# Altium PCB PCB1.pcbdoc
Units mil, origin at the board's own origin, x right, y up, seen from the top; angles counter-clockwise.
Board outline 1968.5 x 1778.5 mil, 2 copper layers (Top Layer, Bottom Layer), stack 62.205 mil thick; 29 components, 37 nets, 177 pads, 40 vias.
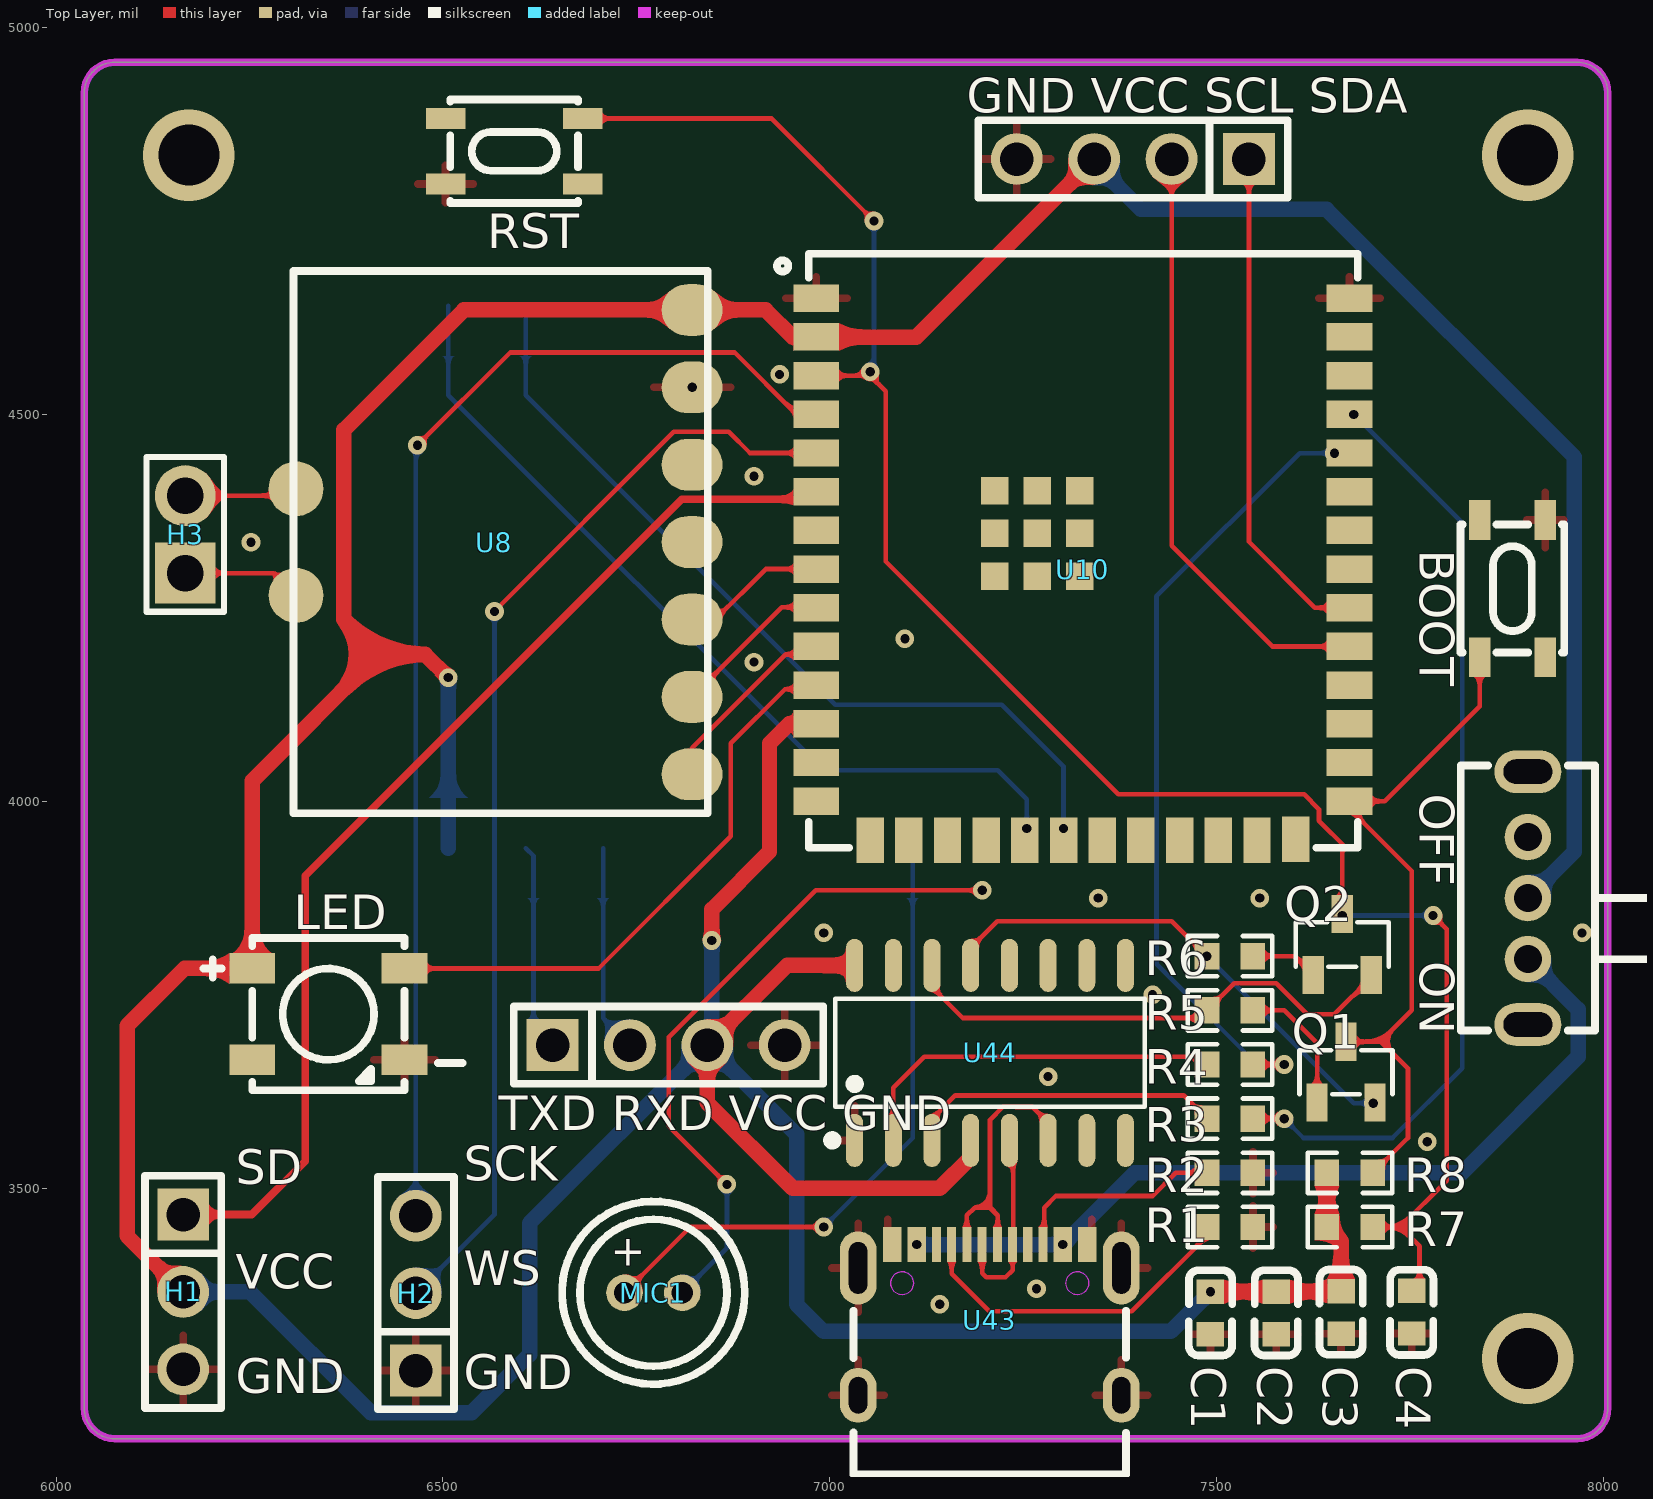
[diagram p0: Top Layer view]
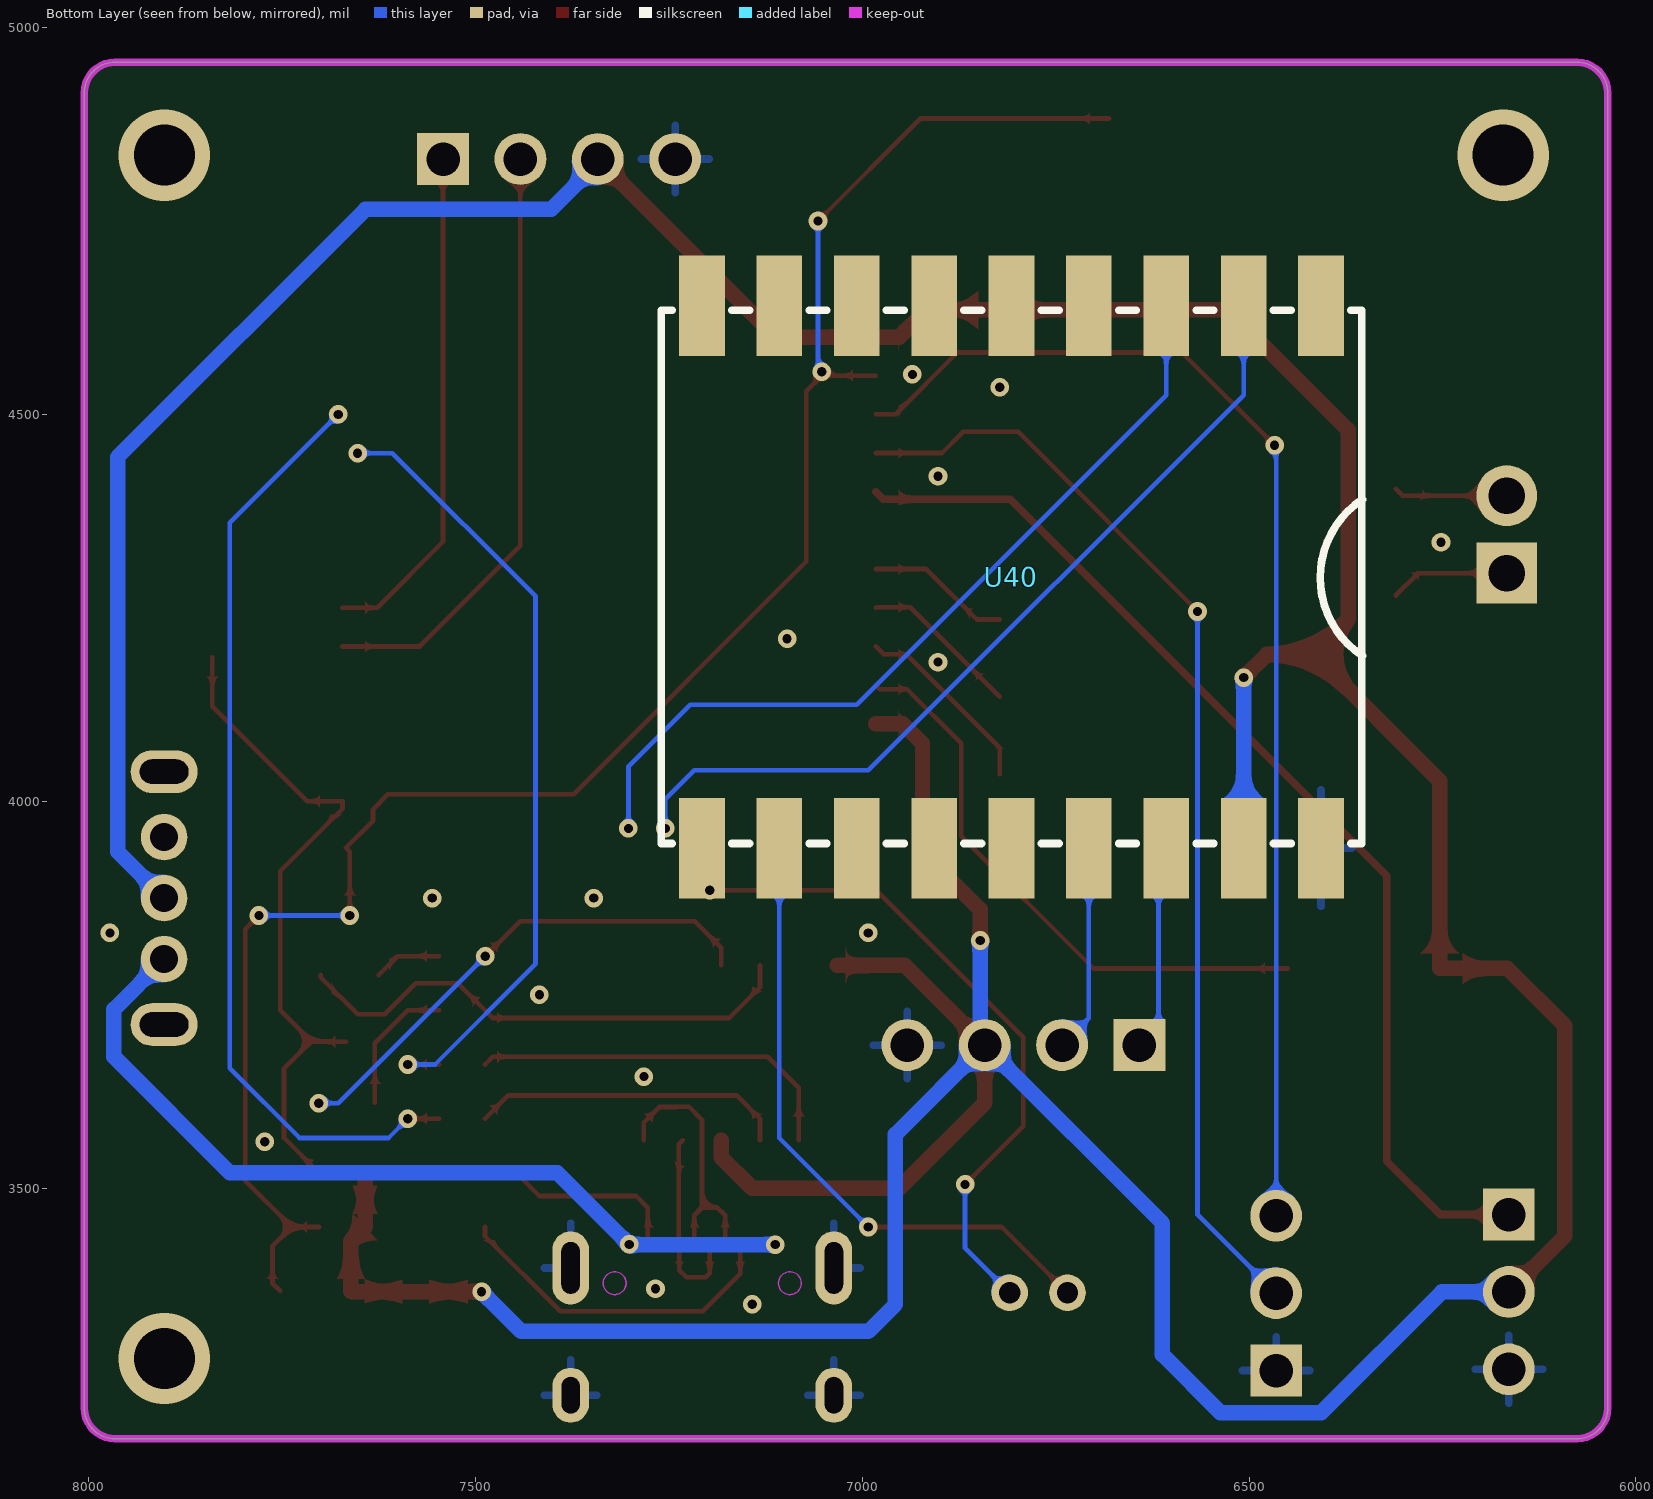
[diagram p1: Bottom Layer view, seen from below]

## Layer stack, top to bottom
Top Solder Mask Layer: solder mask 0.394, Dk 3.3
Top Layer: signal copper 1.378
Dielectric1: surface 59.449, FR4, Dk 4.5
Bottom Layer: signal copper 1.378
Bottom Solder Mask Layer: solder mask 0.394, Dk 3.3

## Board outline
6075.96,4955 7965.73,4955 cw(c7965.73,4915.63) 8005.1,4915.63 8005.1,3215.87 cw(c7965.73,3215.87) 7965.73,3176.5 6075.96,3176.5 cw(c6075.96,3215.87) 6036.59,3215.87 6036.59,4915.63 cw(c6075.96,4915.63)

## Design rules (kind name [scope] priority, off if disabled: settings)
BoardOutlineClearance copperThickness1oz [All] p0: genericclearance=10 ignorepadtopadclearanceinfootprint=FALSE except(0: Arc-SplitContinuation Track-SplitContinuation SMDPad-SplitContinuation THPad-SplitContinuation Via-SplitContinuation Fill-SplitContinuation Poly-SplitContinuation Region-SplitContinuation Text-SplitContinuation)
BoardOutlineClearance copperThickness2oz [All] p0: genericclearance=10 ignorepadtopadclearanceinfootprint=FALSE except(0: Arc-SplitContinuation Track-SplitContinuation SMDPad-SplitContinuation THPad-SplitContinuation Via-SplitContinuation Fill-SplitContinuation Poly-SplitContinuation Region-SplitContinuation Text-SplitContinuation)
BoardOutlineClearance Plane_innerPlane [All] p0: genericclearance=10 ignorepadtopadclearanceinfootprint=FALSE except(0: Arc-SplitContinuation Track-SplitContinuation SMDPad-SplitContinuation THPad-SplitContinuation Via-SplitContinuation Fill-SplitContinuation Poly-SplitContinuation Region-SplitContinuation Text-SplitContinuation)
BoardOutlineClearance Copper_copperRegion [All] p0: genericclearance=10 ignorepadtopadclearanceinfootprint=FALSE except(0: Arc-SplitContinuation Track-SplitContinuation SMDPad-SplitContinuation THPad-SplitContinuation Via-SplitContinuation Fill-SplitContinuation Poly-SplitContinuation Region-SplitContinuation Text-SplitContinuation)
BoardOutlineClearance otherClearance [All] p0: genericclearance=10 ignorepadtopadclearanceinfootprint=FALSE except(0: Arc-SplitContinuation Track-SplitContinuation SMDPad-SplitContinuation THPad-SplitContinuation Via-SplitContinuation Fill-SplitContinuation Poly-SplitContinuation Region-SplitContinuation Text-SplitContinuation)
Clearance copperThickness1oz [All] p1: gap=7 ignorepadtopadclearanceinfootprint=FALSE
Clearance copperThickness2oz [All] p1: gap=7 ignorepadtopadclearanceinfootprint=FALSE
Clearance Plane_innerPlane [All] p1: gap=7 ignorepadtopadclearanceinfootprint=FALSE
Clearance Copper_copperRegion [All] p1: gap=7 ignorepadtopadclearanceinfootprint=FALSE
Clearance otherClearance [All] p1: gap=7 ignorepadtopadclearanceinfootprint=FALSE
DiffPairsRouting differentialPair [All] p1: maxuncoupledlength=10 minlimit=6 maxlimit=Infinity mostfreqgap=6 toplayer_minwidth=5 toplayer_prefwidth=10 toplayer_maxwidth=100 bottomlayer_minwidth=5 bottomlayer_prefwidth=10 bottomlayer_maxwidth=100
PasteMaskExpansion pasteMaskExpansion [All] p1: expansion=0
PlaneConnect innerPlane [All] p1: planeconnectstyle=Relief reliefexpansion=20 reliefentries=4 reliefconductorwidth=10 reliefairgap=10
PolygonConnect copperRegion [All] p1: connectstyle=Relief reliefentries=4 reliefconductorwidth=10 polygonreliefangle="90 Angle" airgapwidth=10
RoutingVias viaSize [All] p1: viastyle="Through Hole" holewidth=12.0078 minholewidth=11.811 maxholewidth=248.0314 width=12.0078 minwidth=11.811 maxwidth=248.0314
SolderMaskExpansion solderMaskExpansion [IsVia] p1: useseparateexpansions=TRUE expansion=-1000 expansionbottom=-1000
SolderMaskExpansion solderMaskExpansion [All] p2: useseparateexpansions=TRUE expansion=2 expansionbottom=2
Width copperThickness1oz [All] p1: maxlimit=100 minlimit=5 preferedwidth=10
Width copperThickness2oz [All] p1: maxlimit=100 minlimit=8 preferedwidth=10

## Components (designator, comment, footprint, x,y, rotation, side; value= is the part's Value field where it differs from the comment)
BOOT "TS-KG89S-AT25F" SW-SMD_4P-L4.2-W3.3-P2.15-LS5.1 7881.99,4275 r90 top
C1 "1uF" C0603 7576.8,3338.8 r270 top
C2 "1uF" C0603 7660.58,3339.58 r270 top
C3 "100nF" C0603 7491.8,3338.8 r270 top
C4 "1uF" C0603 7751.99,3340 r90 top
"GND VCC SCL SDA" "PZ254V-11-04P" HDR-TH_4P-P2.54-V-M 7391.59,4830 r180 top
H1 "PZ254V-11-03P" HDR-TH_3P-P2.54-V-M 6164.29,3366.1 r270 top
H2 "PZ254V-11-03P" HDR-TH_3P-P2.54-V-M 6464.99,3364.5 r90 top
H3 "PZ254V-11-02P" HDR-TH_2P-P2.54-V-M 6166.99,4345 r90 top
LED "XL-5050RGBC-WS2812B" LED-SMD_4P-L5.0-W5.0-BL_XL-5050RGBC 6351.99,3725 r270 top
MIC1 "GMI6050P-36db" MIC-TH_BD6.0-P1.90-D0.4-L-FD_GMI6050P-2CXXDB 6771.99,3365 r0 top
"OFF     ON" "SK12D07VG4" SW-TH_SK12D07VG4 7901.99,3875 r90 top locked
Q1 "SS8050" SOT-23-3_L2.9-W1.3-P1.90-LS2.4-BR 7666.99,3650 r270 top
Q2 "SS8050" SOT-23-3_L2.9-W1.3-P1.90-LS2.4-BR 7661.99,3815 r270 top
R1 "5.1kΩ" R0603 7516.99,3450 r180 top
R2 "5.1kΩ" R0603 7516.99,3520 r0 top
R3 "0Ω" R0603 7516.99,3590 r0 top
R4 "0Ω" R0603 7516.99,3660 r0 top
R5 "10kΩ" R0603 7516.99,3730 r180 top
R6 "10kΩ" R0603 7516.99,3800 r180 top
R7 "10kΩ" R0603 7671.99,3450 r180 top
R8 "10kΩ" R0603 7671.99,3520 r180 top
RST "TS-KG89S-AT25F" SW-SMD_4P-L4.2-W3.3-P2.15-LS5.1 6591.99,4840 r180 top
"TXD RXD VCC GND" "PZ254V-11-04P" HDR-TH_4P-P2.54-V-M 6791.59,3685 r0 top locked
U8 "" MAX98357moudle 6461.99,4335 r90 top
U10 "ESP32-S3-WROOM-1U-N16R8" WIRELM-SMD_ESP32-S3-WROOM-1U 7326.99,4300 r0 top
U40 "ASRPRO-core" COMM-SMD_ASRPRO-CORE-V1.1 6806.99,4290 r270 bottom
U43 "24018-UCAF001-A" TYPE-C-USB-SMD_CF003 7206.59,3330 r0 top locked
U44 "CH340C" SOP-16_L10.0-W3.9-P1.27-LS6.0-BL 7206.99,3675 r0 top

## Footprints (in the part's own frame and the unit in brackets; to place one, negate y for a bottom-side part, rotate by r counter-clockwise, add the part's x,y. Pads: shape width x height; smd on the part's side, far side on the other; paste and mask are expansions set on the pad)
C0603 [mm]
  rect 0.8x0.9 smd: 1(-0.7,0) 2(0.7,0)
  silkscreen extent -1.41,-0.71 1.39,0.72
COMM-SMD_ASRPRO-CORE-V1.1 [mm]
  rect 3.3x1.5 smd: 1(-8.9,10.16) 2(-8.9,7.62) 3(-8.9,5.08) 4(-8.9,2.54) 5(-8.9,0) 6(-8.9,-2.54) 7(-8.9,-5.08) 8(-8.9,-7.62) 9(-8.9,-10.16) 10(8.9,-10.16) 11(8.9,-7.62) 12(8.9,-5.08) 13(8.9,-2.54) 14(8.9,0) 15(8.9,2.54) 16(8.9,5.08) 17(8.9,7.62) 18(8.9,10.16)
  silkscreen extent -8.75,-11.5 8.75,11.52
HDR-TH_2P-P2.54-V-M [mm]
  rect 2x2 hole 1.2: 1(-1.27,0)
  round 2 hole 1.2: 2(1.27,0)
  silkscreen extent -2.54,-1.27 2.54,1.27
HDR-TH_3P-P2.54-V-M [mm]
  rect 1.7x1.7 hole 1.1: 1(-2.54,0)
  round 1.7 hole 1.1: 2(0,0) 3(2.54,0)
  silkscreen extent -3.81,-1.25 3.81,1.25
HDR-TH_4P-P2.54-V-M [mm]
  rect 1.7x1.7 hole 1.1: 1(-3.81,0)
  round 1.7 hole 1.1: 2(-1.27,0) 3(1.27,0) 4(3.81,0)
  silkscreen extent -5.08,-1.27 5.08,1.27
LED-SMD_4P-L5.0-W5.0-BL_XL-5050RGBC [mm]
  rect 1x1.5 smd: 1(-1.5,-2.5) 2(1.5,-2.5) 3(1.5,2.5) 4(-1.5,2.5)
  silkscreen extent -2.5,-4.1 2.5,4.4
MAX98357moudle [mm]
  oval 1.7x2 smd: 1(-7.62,-9.144) 2(-5.08,-9.144) 3(-2.54,-9.144) 4(0,-9.144) 5(2.54,-9.144) 6(5.08,-9.144) 7(7.62,-9.144)
  round 1.8 smd: 8(-1.75,3.856) 9(1.75,3.856)
  silkscreen extent -8.9,-9.66 8.9,3.94
MIC-TH_BD6.0-P1.90-D0.4-L-FD_GMI6050P-2CXXDB [mm]
  round 1.2 hole 0.7: 1(-0.95,0) 2(0.95,0)
  silkscreen extent -3,-3 3,3
R0603 [mil]
  rect 31.75x34.02 smd paste-3937.01 mask+2: 1(-29.66,0) 2(29.66,0)
  silkscreen extent -55,-26 55,26
SOP-16_L10.0-W3.9-P1.27-LS6.0-BL [mm]
  oval 0.56x1.745 smd paste+0 mask+0.051: 1(-4.445,-2.872) 2(-3.175,-2.872) 3(-1.905,-2.872) 4(-0.635,-2.872) 5(0.635,-2.872) 6(1.905,-2.872) 7(3.175,-2.872) 8(4.445,-2.872) 9(4.445,2.872) 10(3.175,2.872) 11(1.905,2.872) 12(0.635,2.872) 13(-0.635,2.872) 14(-1.905,2.872) 15(-3.175,2.872) 16(-4.445,2.872)
  silkscreen extent -5.33,-3.02 5.08,1.77
SOT-23-3_L2.9-W1.3-P1.90-LS2.4-BR [mm]
  rect 1.25x0.7 smd: 1(1,-0.95) 2(1,0.95) 3(-1,0)
  silkscreen extent -0.73,-1.53 0.73,1.53
SW-SMD_4P-L4.2-W3.3-P2.15-LS5.1 [mm]
  rect 1.3x0.7 smd: 1(-2.25,1.075) 2(2.25,1.075) 3(-2.25,-1.075) 4(2.25,-1.075)
  silkscreen extent -2.1,-1.7 2.1,1.7
SW-TH_SK12D07VG4 [mil]
  round 60 hole 36 paste+0 mask+1.97: 1(-78.74,0) 2(0,0) 3(78.74,0)
  oval 55.12x86.61 hole 31.5 slot 62.99 at 90 deg paste+0 mask+1.97: 4(163.38,0) 5(-163.39,0)
  silkscreen extent -171,-191 171,87
TYPE-C-USB-SMD_CF003 [mm]
  oval 1.2x2.4 hole 0.6 slot 1.7 at 90 deg paste+0 mask+0.05: 17(4.32,1.705) 20(-4.32,1.705)
  oval 1.2x1.8 hole 0.6 slot 1.2 at 90 deg paste+0 mask+0.05: 18(4.32,-2.475) 19(-4.32,-2.475)
  rect 0.3x1.14 smd paste-100 mask+0.05: A1(-3.35,2.474) A4(-2.55,2.471) A5(-1.25,2.475) A6(-0.25,2.475) A7(0.25,2.474) A8(1.25,2.475) A9(2.55,2.475) A12(3.35,2.475) B1(3.05,2.475) B4(2.25,2.475) B5(1.75,2.475) B6(0.75,2.475) B7(-0.75,2.474) B8(-1.75,2.475) B9(-2.25,2.471) B12(-3.05,2.474)
  Board Outline Layer circle w0.003: c-2.875,1.205 r0.375
  Board Outline Layer circle w0.003: c2.875,1.205 r0.375
  Board Outline Layer region: -2.5,1.205 -2.537,1.042 -2.641,0.912 -2.792,0.839 -2.958,0.839 -3.109,0.912 -3.213,1.042 -3.25,1.205 -3.25,1.205 -3.213,1.368 -3.109,1.498 -2.958,1.571 -2.792,1.571 -2.641,1.498 -2.537,1.368 -2.5,1.205
  Board Outline Layer region: -2.5,1.205 -2.537,1.042 -2.641,0.912 -2.792,0.839 -2.958,0.839 -3.109,0.912 -3.213,1.042 -3.25,1.205 -3.25,1.205 -3.213,1.368 -3.109,1.498 -2.958,1.571 -2.792,1.571 -2.641,1.498 -2.537,1.368 -2.5,1.205
  Board Outline Layer region: 3.25,1.205 3.213,1.042 3.109,0.912 2.958,0.839 2.792,0.839 2.641,0.912 2.537,1.042 2.5,1.205 2.5,1.205 2.537,1.368 2.641,1.498 2.792,1.571 2.958,1.571 3.109,1.498 3.213,1.368 3.25,1.205
  Board Outline Layer region: 3.25,1.205 3.213,1.042 3.109,0.912 2.958,0.839 2.792,0.839 2.641,0.912 2.537,1.042 2.5,1.205 2.5,1.205 2.537,1.368 2.641,1.498 2.792,1.571 2.958,1.571 3.109,1.498 3.213,1.368 3.25,1.205
  silkscreen extent -4.47,-5.07 4.47,0.3
WIRELM-SMD_ESP32-S3-WROOM-1U [mm]
  rect 1.5x0.9 smd paste+0 mask+0.05: 1(-8.75,8.895) 2(-8.75,7.625) 3(-8.75,6.355) 4(-8.75,5.085) 5(-8.75,3.815) 6(-8.75,2.545) 7(-8.75,1.275) 8(-8.75,0.005) 9(-8.75,-1.265) 10(-8.75,-2.535) 11(-8.75,-3.805) 12(-8.75,-5.075) 13(-8.75,-6.345) 14(-8.75,-7.615) 27(8.75,-7.615) 28(8.75,-6.345) 29(8.75,-5.075) 30(8.75,-3.805) 31(8.75,-2.535) 32(8.75,-1.265) 33(8.75,0.005) 34(8.75,1.275) 35(8.75,2.545) 36(8.75,3.815) 37(8.75,5.085) 38(8.75,6.355) 39(8.75,7.625) 40(8.75,8.895)
  rect 0.9x1.5 smd paste+0 mask+0.05: 15(-6.985,-8.895) 16(-5.715,-8.895) 17(-4.445,-8.895) 18(-3.175,-8.895) 19(-1.905,-8.895) 20(-0.635,-8.895) 21(0.635,-8.895) 22(1.905,-8.895) 23(3.175,-8.895) 24(4.445,-8.895) 25(5.715,-8.895) 26(6.985,-8.865)
  rect 0.9x0.9 smd: 41(-2.9,-0.225) 41(-2.9,1.175) 41(-2.9,2.575) 41(-1.5,-0.225) 41(-1.5,1.175) 41(-1.5,2.575) 41(-0.1,-0.225) 41(-0.1,1.175) 41(-0.1,2.575)
  silkscreen extent -10.04,-9.14 9.02,10.36

## Via types
v1: diameter 24.02, hole 12.01, Top Layer to Bottom Layer, 37 vias
v2: diameter 118.11, hole 78.74, Top Layer to Bottom Layer, 3 vias

## Nets (pads, with @x,y where several pads share a name; then routed paths per layer and width w, separated by ;. In a path a pad name is that pad's centre, name@x,y a point inside that pad or via, vN(x,y) a via of type N, cw(c..) or ccw(c..) an arc to the next point about the centre after c; other vN are vias at no path point)
5V: "GND VCC SCL SDA.3" "OFF     ON.2" "TXD RXD VCC GND.3" C1.1 C2.1 C3.1 H1.2 LED.1 R7.2 R8.2 U8.7 U10.2 U10.12 U40.17 U44.4 U44.16 | length 7740.4
  Top Layer w20: H1.2 6091.99,3438.4 6091.99,3710 6166.04,3784.05 LED.1 6253.57,4026.57 6416.99,4190 ; v1(6506.99,4160) 6476.99,4190 6416.99,4190 ; v1(6847.5,3820.2) 6847.5,3860.51 6921.99,3935 6921.99,4075 6947.19,4100.19 U10.12 ; U10.2 U10.2@6982.31,4600 ; U44.16 6944.68,3788.09 6841.59,3685 6841.59,3610.4 6951.99,3500 7141.99,3500 7181.99,3540 U44.4 ; 7341.59,4830 7111.59,4600 U10.2@6982.31,4600 ; v1(7491.8,3366.36) C1.1 7659.8,3366.36 C2.1 7660.58,3431.75 R7.2 R8.2 ; 6416.99,4190 6371.99,4235 6371.99,4480 6526.99,4635 U8.7 6916.99,4635 6951.99,4600 U10.2@6982.31,4600
  Bottom Layer w20: H1.2 6250.89,3366.1 6406.99,3210 6536.99,3210 6611.99,3285 6611.99,3455 6841.59,3684.6 6841.59,3685 ; U40.17 v1(6506.99,4160) ; v1(6847.5,3820.2) 6847.5,3690.91 6841.59,3685 ; 7341.59,4830 7341.59,4825.4 7401.99,4765 7641.99,4765 7961.99,4445 7961.99,3935 7901.99,3875 ; v1(7491.8,3366.36) 7440.44,3315 6991.99,3315 6956.99,3350 6956.99,3569.6 6841.59,3685
$1N3496: H3.1 U8.8 | length 155.2
  Top Layer w6: H3.1 6281.29,4295 U8.8
$1N3497: H3.2 U8.9 | length 146.9
  Top Layer w6: H3.2 6301.29,4395 U8.9
$1N3534: MIC1.2 U40.10 | length 868.9
  Top Layer w6: v1(6866.99,3505) 6791.99,3580 6791.99,3695.43 6981.56,3885 v1(7196.99,3885)
  Bottom Layer w6: MIC1.2 6866.99,3422.6 v1(6866.99,3505)
$1N3535: MIC1.1 U40.11 | length 829.9
  Top Layer w6: MIC1.1 6819.59,3450 v1(6991.99,3450)
  Bottom Layer w6: v1(6991.99,3450) 7106.99,3565 U40.11
$1N3562: R2.1 U43.B5 | length 277.2
  Top Layer w6: U43.B5 7276.99,3428.94 7276.99,3475 7291.99,3490 7416.99,3490 7446.99,3520 R2.1
$1N3563: R1.2 U43.A5 | length 440.1
  Top Layer w6: U43.A5 7157.38,3389.61 7206.09,3340.9 7390.18,3340.9 7487.33,3438.06 R1.2
$1N3588: R4.1 U44.2 | length 494.1
  Top Layer w6: U44.2 7081.99,3630 7121.99,3670 7477.33,3670 R4.1
$1N3589: R3.1 U44.3 | length 408.3
  Top Layer w6: U44.3 7131.99,3590 7161.99,3620 7457.33,3620 R3.1
$1N3601: Q1.1 R5.1 | length 177.4
  Top Layer w6: R5.1 7586.99,3730 7629.59,3687.4 Q1.1
$1N3602: Q2.1 R6.1 | length 88
  Top Layer w6: R6.1 7600.22,3800 Q2.1
AS-RXD: "TXD RXD VCC GND.2" U40.15 | length 268.9
  Bottom Layer w6: U40.15 6706.99,3719.6 6741.59,3685
AS-TXD: "TXD RXD VCC GND.1" U40.16 | length 268.9
  Bottom Layer w6: U40.16 6616.99,3929.61 6616.99,3709.6 6641.59,3685
BCLK: U8.2 U10.9 | length 208.8
  Top Layer w6: U8.2 6937.92,4250.93 6981.77,4250.93 U10.9
CAT-RXD: U40.4
CAT-TXD: U40.5
DIN: U8.3 U10.8 | length 187.5
  Top Layer w6: U8.3 6851.99,4235 6917.19,4300.19 U10.8
DTR: Q1.2 R6.2 U44.13 | length 656.8
  Top Layer w6: U44.13 7181.99,3810.68 7216.31,3845 7441.99,3845 v1(7486.99,3800) ; v1(7701.99,3610) 7703.76,3610 Q1.2
  Bottom Layer w6: v1(7486.99,3800) 7676.99,3610 v1(7701.99,3610)
GND: "GND VCC SCL SDA.4" "TXD RXD VCC GND.4" BOOT.4 C1.2 C2.2 C3.2 C4.1 H1.3 H2.1 LED.3 R1.1 R2.2 RST.2 U8.6 U10.1 U10.40 U40.18 U43.17 U43.18 U43.19 U43.20 U43.A1 U43.A12 U43.B1 U43.B12 U44.1
  other v1: 7141.99,3350 7266.99,3370 7771.99,3560 7281.99,3644.33 7416.99,3750 6991.99,3830 7971.99,3830 7346.99,3875 7555.32,3875 6901.99,4180 7096.99,4210 6251.99,4335 6901.99,4420 6821.99,4535 6934.98,4551.7
IO0: BOOT.1 Q1.3 R8.1 U10.27 | length 892
  Top Layer w6: Q1.3 7711.36,3689.37 ; R8.1@7701.65,3519.66 7746.99,3565 7746.99,3655 7712.62,3689.37 7711.36,3689.37 ; BOOT.1 7839.67,4122.68 7717.19,4000.2 U10.27 7671.48,3990.51 7751.99,3910 7751.99,3730 7711.36,3689.37
LRC: U8.1 U10.10 | length 248.9
  Top Layer w6: U8.1 6821.99,4069.06 6942.93,4190 6972.31,4190 U10.10
PRO-TXD: 
RST: C4.2 Q2.3 R7.1 RST.3 U10.3 | length 2477.2
  Top Layer w6: RST.3 6924.67,4882.32 v1(7056.99,4750) ; U10.3 7051.8,4550.19 7071.99,4530 7071.99,4310 7372.75,4009.24 7612.75,4009.24 7631.99,3990 7631.99,3975 7666.99,3940 7661.99,3935 v1(7661.99,3852.5) ; R7.1 7736.99,3450 ; C4.2 7761.99,3377.56 7761.99,3425 7736.99,3450 ; v1(7779.49,3852.5) 7796.99,3835 7796.99,3510 7736.99,3450
  Bottom Layer w6: v1(7051.99,4555) 7056.99,4560 v1(7056.99,4750) ; v1(7661.99,3852.5) v1(7779.49,3852.5)
RTS: Q2.2 R5.2 U44.14 | length 670.1
  Top Layer w6: U44.14 7131.99,3760 7171.99,3720 7477.33,3720 R5.2 7522.33,3765 7576.99,3765 7616.99,3725 7651.99,3725 7699.39,3772.4 Q2.2
RX: U10.19 U40.2 | length 1116.8
  Bottom Layer w6: U40.2 6506.99,4525 6991.99,4040 7216.99,4040 7254.51,4002.48 v1(7254.51,3965)
RXD: R4.2 U10.36 | length 1040.8
  Top Layer w6: R4.2 v1(7586.99,3660)
  Bottom Layer w6: v1(7586.99,3660) 7551.99,3660 7421.99,3790 7421.99,4265 7606.99,4450 v1(7651.99,4450)
SCK: H2.3 U10.4 | length 1594.6
  Top Layer w6: v1(6466.99,4460) 6586.99,4580 6876.99,4580 6956.8,4500.19 U10.4
  Bottom Layer w6: H2.3 6464.99,4458 v1(6466.99,4460)
SCL: "GND VCC SCL SDA.2" U10.31 | length 783.4
  Top Layer w6: 7441.59,4830 7441.59,4330.4 7571.8,4200.19 U10.31
SD: H1.1 U10.6 | length 1421.1
  Top Layer w10: H1.1 6253.09,3466.1 6321.99,3535 6321.99,3903.77 6808.78,4390.55 6972.86,4390.55 U10.6
SDA: "GND VCC SCL SDA.1" U10.32 | length 659.8
  Top Layer w6: 7541.59,4830 7541.59,4335.4 7626.8,4250.19 U10.32
TX: U10.20 U40.3 | length 1089.2
  Bottom Layer w6: U40.3 6606.99,4525 7006.99,4125 7221.99,4125 7301.99,4045 v1(7301.99,3965)
TXD: R3.2 U10.37 | length 1221
  Top Layer w6: R3.2 v1(7586.99,3590)
  Bottom Layer w6: v1(7586.99,3590) 7611.99,3565 7726.99,3565 7816.99,3655 7816.99,4360 v1(7676.99,4500)
USB_D+: U43.A6 U43.B6 U44.5 | length 253
  Top Layer w6: U43.A6 7196.99,3427.2 7196.99,3390 7201.99,3385 7226.99,3385 7236.24,3394.24 7236.24,3400.24 7236.12,3400.36 U43.B6 7237.15,3428.47 7237.15,3556.75 U44.5
USB_D-: U43.A7 U43.B7 U44.6 | length 351.8
  Top Layer w6: U43.B7 7177.06,3465 7187.06,3475 7204.15,3475 ; U43.A7 7216.99,3427.95 7216.99,3465 7206.99,3475 7204.15,3475 ; U44.6 7281.99,3585 7261.99,3605 7240.53,3605 7240.28,3605.24 7223.71,3605.24 7206.99,3588.53 7206.99,3477.84 7204.15,3475
VBUS: "OFF     ON.1" U43.A4 U43.A9 U43.B4 U43.B9 | length 1108.6
  Bottom Layer w20: v1(7112.1,3427.28) 7300.92,3427.28 v1(7301.08,3427.44) 7393.64,3520 7816.99,3520 7966.99,3670 7966.99,3731.26 7901.99,3796.26
WS: H2.2 U10.5 | length 1446.4
  Top Layer w6: v1(6566.68,4245.31) 6567.68,4246.31 6567.68,4246.62 6798.51,4477.45 6869.55,4477.45 6896.8,4450.19 U10.5
  Bottom Layer w6: H2.2 6566.68,3466.19 v1(6566.68,4245.31)
WSDIN: LED.4 U10.11 | length 754
  Top Layer w6: LED.4 6701.04,3784.05 6871.99,3955 6871.99,4075 6941.99,4145 6977.31,4145 U10.11
pads on no net: "OFF     ON.3" "OFF     ON.4" "OFF     ON.5" BOOT.2 BOOT.3 LED.2 RST.1 RST.4 U8.4 U8.5 U10.7 U10.13 U10.14 U10.15 U10.16 U10.17 U10.18 U10.21 U10.22 U10.23 U10.24 U10.25 U10.26 U10.28 U10.29 U10.30 U10.33 U10.34 U10.35 U10.38 U10.39 U10.41 U40.1 U40.6 U40.7 U40.8 U40.9 U40.12 U40.13 U40.14 U43.A8 U43.B8 U44.7 U44.8 U44.9 U44.10 U44.11 U44.12 U44.15
copper on no net:
  other v2: 7901.59,3280 6171.59,4835 7901.59,4835

## Polygon pours and split planes (outlines as drawn)
GND on Top Layer (solid, remove dead copper, pour order 0): 5971.99,5045 8046.99,5045 8046.99,3120 5971.99,3120
GND on Bottom Layer (solid, remove dead copper, pour order 2): 5916.99,5120 8121.99,5120 8121.99,3000 5916.99,3000

## Keep-outs
Board Outline Layer:
  the board outline again, w10

## Other copper
Top Layer:
  region net 5V: 6124.88,3391.37 6139.03,3405.51 6140.51,3404.14 6142.01,3403 6143.51,3402.07 6145.04,3401.32 6146.58,3400.73 6148.14,3400.29 6151.37,3399.77 6154.74,3399.59 6158.31,3399.6 6162.1,3399.62 6166.16,3399.51 6130.88,3364.24 6130.77,3368.29 6130.8,3372.08 6130.8,3375.65 6130.62,3379.03 6130.1,3382.25 6129.66,3383.82 6129.08,3385.36 6128.33,3386.88 6127.39,3388.39 6126.25,3389.88
  region net SD: 6212.76,3471.1 6212.76,3461.1 ccw(c6212.76,3442.35) 6197.76,3453.6 6197.76,3478.6 ccw(c6212.76,3489.85)
  region net 5V: 6837.5,3834.6 6857.5,3834.6 6857.59,3831.96 6857.82,3829.45 6858.51,3825.07 6859.2,3821.86 6859.51,3820.2 6835.5,3820.2 6835.81,3821.86 6836.5,3825.07 6837.19,3829.45 6837.42,3831.96
  region net 5V: 6947.19,4090.2 6947.19,4110.19 ccw(c6944.94,4117.91) 6952.98,4117.91 6952.98,4082.48 ccw(c6944.94,4082.48)
  region net SD: 6937.98,4385.55 6937.98,4395.55 ccw(c6937.98,4414.3) 6952.98,4403.05 6952.98,4382.48 ccw(c6937.98,4347.4)
  region net RST: 7758.99,3392.31 7764.99,3392.31 ccw(c7776.24,3392.31) 7769.49,3383.31 7754.49,3383.31 ccw(c7747.74,3392.31)
  region net SDA: 7544.59,4787.54 7538.59,4787.54 ccw(c7527.34,4787.54) 7534.09,4796.54 7549.09,4796.54 ccw(c7555.84,4787.54)
  region net SCL: 7444.59,4784.27 7438.59,4784.27 7438.41,4785.82 7437.88,4787.38 7437.04,4788.96 7435.94,4790.53 7434.61,4792.11 7433.1,4793.68 7429.68,4796.76 7422.39,4802.6 7419.17,4805.26 7416.65,4807.69 7466.54,4807.69 7464.02,4805.26 7460.79,4802.6 7453.51,4796.76 7450.09,4793.68 7448.58,4792.11 7447.25,4790.53 7446.15,4788.96 7445.31,4787.38 7444.78,4785.82
  region net WSDIN: 6488.95,3787.05 6488.95,3781.05 ccw(c6488.95,3769.8) 6479.95,3776.55 6479.95,3791.55 ccw(c6488.95,3798.3)
  region net $1N3601: 7626.59,3644.24 7632.59,3644.24 ccw(c7643.84,3644.24) 7637.09,3635.24 7622.09,3635.24 ccw(c7615.34,3644.24)
  region net IO0: 7689.77,3692.37 7689.77,3686.37 ccw(c7689.77,3675.12) 7680.77,3681.87 7680.77,3696.87 ccw(c7689.77,3703.62)
  region net $1N3602: 7606.08,3789.9 7602.82,3801.64 ccw(c7616.07,3814.89) 7610.82,3796.91 7610.82,3781.91 ccw(c7592.83,3776.65)
  region net RTS: 7677.62,3746.39 7680.88,3758.13 ccw(c7667.63,3771.38) 7685.62,3766.12 7685.62,3751.12 ccw(c7690.87,3733.14)
  region net RST: 7658.99,3887.98 7664.99,3887.98 ccw(c7676.24,3887.98) 7669.49,3878.98 7654.49,3878.98 ccw(c7647.74,3887.98)
  region net $1N3562: 7462.46,3517 7462.46,3523 ccw(c7462.46,3534.25) 7471.46,3527.5 7471.46,3512.5 ccw(c7462.46,3505.75)
  region net IO0: 7717.94,3540.19 7720.71,3534.47 ccw(c7733.44,3524.93) 7717.53,3524.93 7708.4,3537.01 ccw(c7708.4,3552.92)
  region net RST: 7726.53,3453 7726.53,3447 ccw(c7726.53,3435.75) 7717.53,3442.5 7717.53,3457.5 ccw(c7726.53,3464.25)
  region net $1N3563: 7481.78,3428.26 7470.04,3425 ccw(c7456.79,3438.25) 7474.77,3432.99 7489.77,3432.99 ccw(c7495.03,3415.01)
  region net DTR: 7468.28,3814.47 7471.05,3820.19 ccw(c7480.59,3832.92) 7480.59,3817.01 7471.46,3804.93 ccw(c7455.55,3804.93)
  region net $1N3602: 7571.53,3803 7571.53,3797 ccw(c7571.53,3785.75) 7562.53,3792.5 7562.53,3807.5 ccw(c7571.53,3814.25)
  region net RTS: 7462.46,3717 7462.46,3723 ccw(c7462.46,3734.25) 7471.46,3727.5 7471.46,3712.99 ccw(c7462.46,3704.89)
  region net RTS: 7503.28,3750.19 7506.39,3744.81 ccw(c7519.12,3735.27) 7503.21,3735.27 7493.74,3747.01 ccw(c7493.74,3762.92)
  region net $1N3601: 7571.53,3733 7571.53,3727 ccw(c7571.53,3715.75) 7562.53,3722.5 7562.53,3737.5 ccw(c7571.53,3744.25)
  region net RXD: 7571.53,3663 7571.53,3657 ccw(c7571.53,3645.75) 7562.53,3652.5 7562.53,3667.5 ccw(c7571.53,3674.25)
  region net TXD: 7571.53,3593 7571.53,3587 ccw(c7571.53,3575.75) 7562.53,3582.5 7562.53,3597.5 ccw(c7571.53,3604.25)
  region net $1N3589: 7468.28,3604.81 7471.39,3610.19 ccw(c7480.93,3622.92) 7480.93,3607.01 7471.46,3595.27 ccw(c7455.55,3595.27)
  region net IO0: 7842.67,4151.83 7836.67,4151.83 ccw(c7825.42,4151.83) 7832.17,4160.83 7847.17,4160.83 ccw(c7853.92,4151.83)
  region net LRC: 6818.99,4069.06 6824.99,4069.06 6825.06,4068.62 6825.24,4068.36 6825.9,4068.22 6827.9,4068.46 6816.09,4068.46 6818.09,4068.22 6818.74,4068.36 6818.93,4068.62
  region net BCLK: 6851.41,4168.66 6856.98,4165.74 6854.83,4163.43 6853.94,4162.25 6853.26,4161.06 6852.84,4159.85 6852.76,4158.63 6853.06,4157.4 6853.83,4156.16 6841.98,4165.36 6843.24,4164.95 6844.5,4164.85 6845.75,4165.03 6846.97,4165.44 6848.16,4166.05 6849.3,4166.82
  region net DIN: 6866.74,4253.99 6865.58,4244.34 6864,4242.53 6862.63,4240.43 6861.68,4238.16 6861.42,4237 6861.35,4235.84 6857.63,4250.37 6858.52,4249.14 6859.01,4248.79 6859.51,4248.61 6860.58,4248.69 6861.73,4249.25 6862.93,4250.17 6864.17,4251.35
  region net RST: 7021.03,4553.19 7021.03,4547.19 ccw(c7021.03,4535.94) 7012.03,4542.69 7012.03,4557.69 ccw(c7021.03,4564.44)
  region net DIN: 6943.98,4297.19 6943.98,4303.19 ccw(c6943.98,4314.44) 6952.98,4307.69 6952.98,4292.69 ccw(c6943.98,4285.94)
  region net BCLK: 6943.98,4247.93 6943.98,4253.93 ccw(c6943.98,4265.18) 6952.98,4258.43 6952.98,4243.43 ccw(c6943.98,4236.68)
  region net LRC: 6943.98,4187 6943.98,4193 ccw(c6943.98,4204.25) 6952.98,4197.5 6952.98,4182.5 ccw(c6943.98,4175.75)
  region net WSDIN: 6943.98,4142 6943.98,4148 ccw(c6943.98,4159.25) 6952.98,4152.5 6952.98,4137.5 ccw(c6943.98,4130.75)
  region net IO0: 7710.01,4003.2 7710.01,3997.2 ccw(c7710.01,3985.95) 7701.01,3992.7 7701.01,4007.7 ccw(c7710.01,4014.45)
  region net IO0: 7691.75,3974.49 7680.01,3977.74 ccw(c7666.76,3964.5) 7672.02,3982.48 7687.02,3982.48 ccw(c7705,3987.73)
  region net SCL: 7632.96,4197.19 7632.96,4203.19 ccw(c7632.96,4214.44) 7641.96,4207.69 7641.96,4192.69 ccw(c7632.96,4185.94)
  region net SDA: 7632.96,4247.19 7632.96,4253.19 ccw(c7632.96,4264.44) 7641.96,4257.69 7641.96,4242.69 ccw(c7632.96,4235.94)
  region net $1N3563: 7160.38,3396 7154.38,3396 ccw(c7138.99,3396) 7151.48,3405 7163.29,3405 ccw(c7175.78,3396)
  region net USB_D-: 7174.06,3458.83 7180.06,3458.83 ccw(c7195.46,3458.83) 7182.97,3449.83 7171.16,3449.83 ccw(c7158.67,3458.83)
  region net USB_D+: 7199.99,3396 7193.99,3396 ccw(c7179.55,3396) 7190.85,3405 7202.66,3405 ccw(c7216.52,3396)
  region net USB_D-: 7213.99,3458.83 7219.99,3458.83 ccw(c7238.43,3458.83) 7222.34,3449.83 7210.53,3449.83 ccw(c7200.58,3458.83)
  region net USB_D+: 7239.12,3400.36 7233.12,3400.36 ccw(c7227.96,3400.36) 7230.22,3405 7242.03,3405 ccw(c7244.29,3400.36)
  region net $1N3562: 7273.99,3458.88 7279.99,3458.88 ccw(c7309.51,3458.88) 7281.4,3449.88 7269.59,3449.88 ccw(c7262.6,3458.88)
  region net $1N3588: 7078.99,3602.32 7084.99,3602.32 7085.1,3601.13 7085.38,3599.91 7086.4,3597.45 7087.84,3595.17 7089.49,3593.32 7074.49,3593.32 7076.15,3595.17 7077.59,3597.45 7078.61,3599.91 7078.89,3601.13
  region net $1N3589: 7137.68,3599.92 7145.16,3598.92 7144.32,3597.95 7143.57,3596.82 7142.94,3595.57 7142.45,3594.25 7142.13,3592.89 7141.99,3591.53 7142.06,3590.22 7142.36,3588.99 7129.02,3595.85 7131.39,3596.54 7133.66,3597.34 7135.78,3598.43
  region net USB_D+: 7240.15,3525.95 7234.15,3518.93 7233.89,3521.82 7233.54,3523.2 7233.04,3524.5 7232.35,3525.66 7231.49,3526.65 7230.42,3527.42 7229.14,3527.93 7242.4,3534.95 7240.85,3530.52 7240.34,3528.34
  region net USB_D-: 7267.76,3594.99 7271.84,3599.4 7272.75,3598.63 7273.82,3597.97 7276.3,3596.95 7278.94,3596.37 7281.42,3596.25 7270.97,3585.48 7270.81,3587.96 7270.21,3590.57 7269.19,3593.02 7268.53,3594.08
  region net RTS: 7145.16,3751.08 7137.68,3750.08 7135.78,3751.57 7133.66,3752.66 7131.39,3753.46 7129.02,3754.15 7142.36,3761.01 7142.06,3759.78 7141.99,3758.47 7142.13,3757.11 7142.45,3755.75 7142.94,3754.43 7143.57,3753.18 7144.32,3752.05
  region net DTR: 7192.56,3825.49 7196.36,3820.8 7195.6,3819.91 7194.94,3818.86 7193.89,3816.44 7193.24,3813.86 7193.02,3811.42 7182.92,3822.4 7185.4,3822.48 7188.07,3823.05 7190.58,3824.07 7191.66,3824.73
  region net RST: 7658.99,3868.91 7664.99,3868.91 7665.13,3867.4 7665.51,3866.18 7666.09,3865.17 7666.85,3864.28 7668.76,3862.59 7670.94,3860.51 7653.04,3860.51 7655.23,3862.59 7657.14,3864.28 7657.9,3865.17 7658.48,3866.18 7658.86,3867.4
  region net DTR: 7473.27,3809.48 7477.51,3813.73 7478.67,3812.76 7479.8,3812.16 7480.94,3811.85 7482.1,3811.77 7484.64,3811.92 7487.66,3811.99 7475.01,3799.33 7475.07,3802.35 7475.23,3804.89 7475.14,3806.06 7474.84,3807.19 7474.24,3808.32
  region net RXD: 7570.58,3657 7570.58,3663 7572.09,3663.13 7573.31,3663.51 7574.33,3664.1 7575.21,3664.86 7576.9,3666.77 7578.99,3668.95 7578.99,3651.05 7576.9,3653.23 7575.21,3655.14 7574.33,3655.9 7573.31,3656.49 7572.09,3656.87
  region net TXD: 7570.58,3587 7570.58,3593 7572.09,3593.13 7573.31,3593.51 7574.33,3594.1 7575.21,3594.86 7576.9,3596.77 7578.99,3598.95 7578.99,3581.05 7576.9,3583.23 7575.21,3585.14 7574.33,3585.9 7573.31,3586.49 7572.09,3586.87
  region net IO0: 7711.38,3686.37 7724.11,3673.64 7728.97,3677.27 cw(c7741.69,3690) 7728.97,3702.73 7722.85,3705.1 cw(c7692.12,3735.83) 7692.12,3692.37
  region net USB_D-: 7219.12,3467.12 7209.83,3476.85 7203.99,3496 cw(c7185.96,3496) 7187.06,3478 7205.14,3472.17 7214.87,3462.88
  region net WS: 6943.98,4447.19 6943.98,4453.19 ccw(c6943.98,4464.44) 6952.98,4457.69 6952.98,4442.69 ccw(c6943.98,4435.94)
  region net SCK: 6948.24,4504.51 6944.98,4516.25 ccw(c6958.23,4529.5) 6952.98,4511.52 6952.98,4496.52 ccw(c6934.99,4491.26)
  region net SCK: 6476.48,4473.73 6480.72,4469.48 6479.75,4468.32 6479.15,4467.19 6478.85,4466.06 6478.76,4464.89 6478.92,4462.35 6478.98,4459.33 6466.33,4471.99 6469.35,4471.92 6471.89,4471.77 6473.05,4471.85 6474.19,4472.16 6475.32,4472.76
  region net $1N3497: 6220.8,4398 6220.8,4392 6218.94,4391.78 6217.08,4391.14 6215.22,4390.13 6213.36,4388.81 6211.51,4387.22 6209.68,4385.4 6206.08,4381.3 6199.26,4372.55 6196.13,4368.68 6193.24,4365.66 6193.24,4424.34 6196.13,4421.32 6199.26,4417.45 6206.08,4408.7 6209.68,4404.6 6211.51,4402.78 6213.36,4401.19 6215.22,4399.87 6217.08,4398.86 6218.94,4398.22
  region net $1N3497: 6269.55,4392 6265.78,4398 6269.15,4398.05 6270.69,4398.2 6272.07,4398.51 6273.22,4399.03 6274.1,4399.83 6274.63,4400.95 6274.78,4402.46 6278.55,4387.94 6277.85,4389.01 6276.97,4389.89 6275.93,4390.59 6274.76,4391.14 6272.2,4391.8
  region net $1N3496: 6215.36,4298 6215.36,4292 ccw(c6215.36,4280.75) 6206.36,4287.5 6206.36,4302.5 ccw(c6215.36,4309.25)
  region net $1N3496: 6279.16,4292.88 6283.41,4297.12 6284.18,4296.48 6285.07,4295.94 6286.04,4295.54 6287.07,4295.28 6288.12,4295.16 6289.14,4295.22 6290.11,4295.46 6291,4295.89 6280.39,4285.29 6280.83,4286.17 6281.06,4287.14 6281.12,4288.17 6281.01,4289.21 6280.75,4290.24 6280.34,4291.22 6279.81,4292.11
  region net 5V: 7539.52,3376.36 7539.52,3356.36 ccw(c7539.52,3275.2) 7509.52,3350.61 7509.52,3382.11 ccw(c7539.52,3457.52)
  region net 5V: 7529.09,3356.36 7529.09,3376.36 ccw(c7529.09,3457.52) 7559.09,3382.11 7559.09,3350.61 ccw(c7529.09,3275.2)
  region net 5V: 7624.52,3376.36 7624.52,3356.36 ccw(c7624.52,3275.2) 7594.52,3350.61 7594.52,3382.11 ccw(c7624.52,3457.52)
  region net 5V: 7612.87,3356.36 7612.87,3376.36 ccw(c7612.87,3448.56) 7642.87,3382.89 7642.87,3351.39 ccw(c7612.87,3263.29)
  region net 5V: 7667.65,3438.82 7653.51,3424.68 ccw(c7626.46,3384.81) 7626.46,3432.99 7658.21,3467.01 ccw(c7704.99,3467.01)
  region net 5V: 7650.58,3412.89 7670.58,3412.89 ccw(c7732.76,3412.89) 7678.3,3382.89 7642.87,3382.89 ccw(c7588.41,3412.89)
  region net 5V: 7652.33,3472.99 7632.33,3472.99 ccw(c7552.81,3472.99) 7626.46,3502.99 7658.21,3502.99 ccw(c7731.86,3472.99)
  region net 5V: 7632.33,3497.01 7652.33,3497.01 ccw(c7731.86,3497.01) 7658.21,3467.01 7626.46,3467.01 ccw(c7552.81,3497.01)
  region net 5V: 6866.86,3724.41 6881.01,3710.27 6879.64,3708.78 6878.5,3707.29 6877.56,3705.78 6876.81,3704.26 6876.23,3702.72 6875.79,3701.15 6875.27,3697.93 6875.09,3694.55 6875.09,3690.98 6875.12,3687.19 6875.01,3683.14 6839.73,3718.41 6843.79,3718.52 6847.58,3718.5 6851.14,3718.49 6854.52,3718.67 6857.75,3719.19 6859.31,3719.63 6860.85,3720.22 6862.38,3720.97 6863.88,3721.9 6865.38,3723.04
  region net 5V: 6990.97,3778.09 6990.97,3798.09 7001.99,3798.06 7007.06,3798.35 7009.4,3798.67 7011.6,3799.13 7013.61,3799.77 7015.43,3800.61 7017.03,3801.68 7018.39,3803.01 7019.49,3804.62 7020.3,3806.54 7020.8,3808.8 7020.97,3811.42 7020.97,3764.76 7020.8,3767.38 7020.3,3769.64 7019.49,3771.56 7018.39,3773.17 7017.03,3774.5 7015.43,3775.57 7013.61,3776.41 7011.6,3777.05 7009.4,3777.51 7007.06,3777.83 7001.99,3778.12
  region net 5V: 6851.59,3639.27 6831.59,3639.27 6831.51,3641.28 6831.26,3643.15 6830.86,3644.87 6830.31,3646.48 6829.63,3647.98 6828.84,3649.4 6826.93,3652.05 6824.66,3654.56 6822.14,3657.08 6819.44,3659.75 6816.65,3662.69 6866.54,3662.69 6863.75,3659.75 6861.05,3657.08 6858.53,3654.56 6856.26,3652.05 6854.35,3649.4 6853.56,3647.98 6852.88,3646.48 6852.33,3644.87 6851.93,3643.15 6851.68,3641.28
  region net 5V: 6194.04,3774.05 6194.04,3794.05 ccw(c6194.04,3845.36) 6224.04,3803.74 6224.04,3764.36 ccw(c6194.04,3722.74)
  region net 5V: 7506.21,3376.36 7506.21,3356.36 7503.57,3356.27 7501.06,3356.05 7496.68,3355.36 7493.46,3354.67 7491.8,3354.35 7491.8,3378.37 7493.46,3378.05 7496.68,3377.36 7501.06,3376.67 7503.57,3376.45
  region net 5V: 6489.73,4163.12 6503.88,4177.26 6505.81,4175.45 6507.74,4173.84 6511.33,4171.23 6514.09,4169.44 6515.49,4168.49 6498.5,4151.51 6497.55,4152.9 6495.76,4155.67 6493.15,4159.25 6491.55,4161.19
  region net 5V: 6243.57,3833.74 6263.57,3833.74 ccw(c6301.07,3833.74) 6278.57,3803.74 6228.57,3803.74 ccw(c6206.07,3833.74)
  region net 5V: 6364.92,4227.93 cw(c6317.73,4190.27) 6360.43,4147.57 6378.71,4137.57 cw(c6481.29,4034.99) 6476.99,4180 6476.99,4200 cw(c6480.75,4343.76) 6379.07,4242.07
  region net 5V: 6763.84,4625 6763.84,4645 6765.95,4645.09 6768.03,4645.34 6772.11,4646.29 6776.07,4647.77 6779.91,4649.69 6783.62,4651.96 6787.19,4654.49 6790.6,4657.2 6793.84,4660 6793.84,4610 6790.6,4612.8 6787.19,4615.51 6783.62,4618.04 6779.91,4620.31 6776.07,4622.23 6772.11,4623.71 6768.03,4624.66 6765.95,4624.91
  region net 5V: 7316.33,4790.59 7302.18,4804.73 7303.55,4806.22 7304.69,4807.71 7305.63,4809.22 7306.38,4810.74 7306.96,4812.28 7307.4,4813.85 7307.92,4817.07 7308.1,4820.45 7308.1,4824.02 7308.07,4827.81 7308.18,4831.86 7343.46,4796.59 7339.4,4796.48 7335.61,4796.5 7332.04,4796.51 7328.67,4796.33 7325.44,4795.81 7323.88,4795.37 7322.34,4794.78 7320.81,4794.03 7319.31,4793.1 7317.81,4791.96
  region net 5V: 7042.03,4610 7042.03,4590 ccw(c7042.03,4526.41) 7012.03,4582.48 7012.03,4617.91 ccw(c7042.03,4670.84)
  region net RST: 7064.83,4541.4 7056.86,4540.89 7056.04,4541.51 7055.02,4541.99 7052.57,4542.67 7050.01,4543.17 7047.83,4543.74 7063.65,4552.11 7063.04,4549.22 7062.84,4546.37 7062.99,4545.01 7063.34,4543.71 7063.95,4542.51
  region net RST: 7039.83,4547.19 7032.67,4553.19 7034.04,4553.35 7035.34,4553.78 7036.56,4554.45 7037.69,4555.32 7038.72,4556.35 7039.63,4557.5 7041.08,4560 7048.24,4543.59 7046.18,4544.54 7044.09,4545.73 7041.98,4546.76 7040.91,4547.08
  region net RST: 6715.17,4885.32 6715.17,4879.32 ccw(c6715.17,4868.07) 6706.17,4874.82 6706.17,4889.82 ccw(c6715.17,4896.57)
  region net RST: 7043.27,4759.48 7047.51,4763.73 7048.67,4762.76 7049.8,4762.16 7050.94,4761.85 7052.1,4761.77 7054.64,4761.92 7057.66,4761.99 7045.01,4749.33 7045.07,4752.35 7045.23,4754.89 7045.14,4756.06 7044.84,4757.19 7044.24,4758.32
  region net $1N3534: 6853.27,3514.48 6857.51,3518.73 6858.67,3517.76 6859.8,3517.16 6860.94,3516.85 6862.1,3516.77 6864.64,3516.92 6867.66,3516.99 6855.01,3504.33 6855.07,3507.35 6855.23,3509.89 6855.14,3511.06 6854.84,3512.19 6854.24,3513.32
  region net $1N3535: 6975.58,3447 6975.58,3453 6977.09,3453.13 6978.31,3453.51 6979.33,3454.1 6980.21,3454.86 6981.9,3456.77 6983.99,3458.95 6983.99,3441.05 6981.9,3443.23 6980.21,3445.14 6979.33,3445.9 6978.31,3446.49 6977.09,3446.87
  region net $1N3535: 6755.3,3389.95 6759.54,3385.71 6758.26,3384.3 6757.29,3382.98 6756.59,3381.74 6756.15,3380.54 6755.92,3379.37 6755.87,3378.22 6756.19,3375.89 6757.56,3370.65 6758.1,3367.45 6758.21,3365.65 6758.18,3363.69 6733.28,3388.59 6735.25,3388.62 6737.05,3388.5 6740.25,3387.97 6745.49,3386.59 6747.81,3386.27 6748.96,3386.32 6750.13,3386.55 6751.33,3387 6752.58,3387.69 6753.9,3388.66
  region net $1N3588: 7462.46,3667 7462.46,3673 ccw(c7462.46,3685.11) 7471.46,3677.01 7471.46,3662.5 ccw(c7462.46,3655.75)
  region net RST: 7748.48,3465.73 cw(c7717.75,3496.46) 7717.75,3453 7717.75,3447 cw(c7717.75,3403.54) 7748.48,3434.27 7753.97,3437.27 cw(c7766.69,3450) 7753.97,3462.73
  region net RST: 7793.22,3843.02 7788.98,3838.77 7787.82,3839.74 7786.69,3840.34 7785.55,3840.65 7784.39,3840.73 7781.85,3840.58 7778.83,3840.51 7791.48,3853.17 7791.42,3850.15 7791.26,3847.61 7791.35,3846.44 7791.65,3845.31 7792.25,3844.18
  region net 5V: 6880.15,4645 6880.15,4625 6878.04,4624.91 6875.96,4624.66 6871.88,4623.71 6867.92,4622.23 6864.08,4620.31 6860.37,4618.04 6856.8,4615.51 6853.39,4612.8 6850.15,4610 6850.15,4660 6853.39,4657.2 6856.8,4654.49 6860.37,4651.96 6864.08,4649.69 6867.92,4647.77 6871.88,4646.29 6875.96,4645.34 6878.04,4645.09
  region net 5V: 6951.99,4590 6951.99,4610 ccw(c6920.63,4617.91) 6952.98,4617.91 6952.98,4582.48 ccw(c6923.7,4582.48)
  region net $1N3534: 7180.58,3882 7180.58,3888 7182.09,3888.13 7183.31,3888.51 7184.33,3889.1 7185.21,3889.86 7186.9,3891.77 7188.99,3893.95 7188.99,3876.05 7186.9,3878.23 7185.21,3880.14 7184.33,3880.9 7183.31,3881.49 7182.09,3881.87
  region net PRO-TXD: 3008.41,6503 3008.41,6497 3006.9,6496.87 3005.68,6496.49 3004.66,6495.9 3003.78,6495.14 3002.09,6493.23 3000,6491.05 3000,6508.95 3002.09,6506.77 3003.78,6504.86 3004.66,6504.1 3005.68,6503.51 3006.9,6503.13
Bottom Layer:
  region net 5V: 6210.03,3376.1 6210.03,3356.1 6208.01,3356.01 6206.15,3355.76 6204.42,3355.36 6202.82,3354.82 6201.31,3354.14 6199.9,3353.34 6197.25,3351.43 6194.73,3349.17 6192.21,3346.64 6189.55,3343.94 6186.6,3341.16 6186.6,3391.04 6189.55,3388.26 6192.21,3385.56 6194.73,3383.03 6197.25,3380.77 6199.9,3378.86 6201.31,3378.06 6202.82,3377.38 6204.42,3376.84 6206.15,3376.44 6208.01,3376.19
  region net 5V: 6857.5,3805.79 6837.5,3805.79 6837.42,3808.43 6837.19,3810.94 6836.5,3815.32 6835.81,3818.53 6835.5,3820.2 6859.51,3820.2 6859.2,3818.53 6858.51,3815.32 6857.82,3810.94 6857.59,3808.43
  region net RST: 7763.08,3849.5 7763.08,3855.5 7764.59,3855.63 7765.81,3856.01 7766.83,3856.6 7767.71,3857.36 7769.4,3859.27 7771.49,3861.45 7771.49,3843.55 7769.4,3845.73 7767.71,3847.64 7766.83,3848.4 7765.81,3848.99 7764.59,3849.37
  region net RST: 7678.41,3855.5 7678.41,3849.5 7676.9,3849.37 7675.68,3848.99 7674.66,3848.4 7673.78,3847.64 7672.09,3845.73 7670,3843.55 7670,3861.45 7672.09,3859.27 7673.78,3857.36 7674.66,3856.6 7675.68,3856.01 7676.9,3855.63
  region net DTR: 7685.58,3607 7685.58,3613 7687.09,3613.13 7688.31,3613.51 7689.33,3614.1 7690.21,3614.86 7691.9,3616.77 7693.99,3618.95 7693.99,3601.05 7691.9,3603.23 7690.21,3605.14 7689.33,3605.9 7688.31,3606.49 7687.09,3606.87
  region net DTR: 7500.72,3790.52 7496.48,3786.27 7495.32,3787.24 7494.19,3787.84 7493.05,3788.15 7491.89,3788.23 7489.35,3788.08 7486.33,3788.01 7498.98,3800.67 7498.92,3797.65 7498.76,3795.11 7498.85,3793.94 7499.15,3792.81 7499.75,3791.68
  region net RXD: 7570.58,3657 7570.58,3663 7572.09,3663.13 7573.31,3663.51 7574.33,3664.1 7575.21,3664.86 7576.9,3666.77 7578.99,3668.95 7578.99,3651.05 7576.9,3653.23 7575.21,3655.14 7574.33,3655.9 7573.31,3656.49 7572.09,3656.87
  region net RXD: 7635.58,4447 7635.58,4453 7637.09,4453.13 7638.31,4453.51 7639.33,4454.1 7640.21,4454.86 7641.9,4456.77 7643.99,4458.95 7643.99,4441.05 7641.9,4443.23 7640.21,4445.14 7639.33,4445.9 7638.31,4446.49 7637.09,4446.87
  region net TXD: 7600.72,3580.52 7596.48,3576.27 7595.32,3577.24 7594.19,3577.84 7593.05,3578.15 7591.89,3578.23 7589.35,3578.08 7586.33,3578.01 7598.98,3590.67 7598.92,3587.65 7598.76,3585.11 7598.85,3583.94 7599.15,3582.81 7599.75,3581.68
  region net TXD: 7690.72,4490.52 7686.48,4486.27 7685.32,4487.24 7684.19,4487.84 7683.05,4488.15 7681.89,4488.23 7679.35,4488.08 7676.33,4488.01 7688.98,4500.67 7688.92,4497.65 7688.76,4495.11 7688.85,4493.94 7689.15,4492.81 7689.75,4491.68
  region net AS-TXD: 6619.99,3865.65 6613.99,3865.65 ccw(c6602.74,3865.65) 6609.49,3874.65 6624.49,3874.65 ccw(c6631.24,3865.65)
  region net AS-TXD: 6613.99,3727.46 6619.99,3727.46 ccw(c6631.24,3727.46) 6624.49,3718.46 6609.49,3718.46 ccw(c6602.74,3727.46)
  region net AS-RXD: 6709.99,3865.65 6703.99,3865.65 ccw(c6692.74,3865.65) 6699.49,3874.65 6714.49,3874.65 ccw(c6721.24,3865.65)
  region net AS-RXD: 6707.13,3715.22 6711.38,3719.46 6712.61,3718.5 6714.09,3717.76 6715.79,3717.24 6717.69,3716.91 6719.74,3716.73 6721.92,3716.69 6726.52,3716.93 6735.8,3717.95 6739.96,3718.35 6743.46,3718.41 6708.18,3683.14 6708.24,3686.64 6708.64,3690.8 6709.67,3700.08 6709.9,3704.68 6709.86,3706.85 6709.69,3708.91 6709.35,3710.8 6708.83,3712.51 6708.1,3713.99
  region net RX: 7251.51,3981.41 7257.51,3981.41 7257.65,3979.9 7258.03,3978.68 7258.61,3977.67 7259.37,3976.78 7261.28,3975.09 7263.46,3973.01 7245.56,3973.01 7247.75,3975.09 7249.65,3976.78 7250.42,3977.67 7251,3978.68 7251.38,3979.9
  region net RX: 6509.99,4566.43 6503.99,4566.43 ccw(c6492.74,4566.43) 6499.49,4575.43 6514.49,4575.43 ccw(c6521.24,4566.43)
  region net TX: 6609.99,4566.43 6603.99,4566.43 ccw(c6592.74,4566.43) 6599.49,4575.43 6614.49,4575.43 ccw(c6621.24,4566.43)
  region net TX: 7298.99,3981.41 7304.99,3981.41 7305.13,3979.9 7305.51,3978.68 7306.09,3977.67 7306.85,3976.78 7308.76,3975.09 7310.94,3973.01 7293.04,3973.01 7295.23,3975.09 7297.14,3976.78 7297.9,3977.67 7298.48,3978.68 7298.86,3979.9
  region net WS: 6569.68,4228.9 6563.68,4228.9 6563.55,4230.41 6563.17,4231.63 6562.58,4232.65 6561.82,4233.53 6559.92,4235.22 6557.73,4237.31 6575.63,4237.31 6573.45,4235.22 6571.54,4233.53 6570.78,4232.65 6570.19,4231.63 6569.82,4230.41
  region net WS: 6495.21,3398.96 6499.46,3394.72 6498.49,3393.49 6497.76,3392.01 6497.24,3390.3 6496.9,3388.41 6496.73,3386.35 6496.69,3384.18 6496.92,3379.58 6497.95,3370.3 6498.35,3366.14 6498.41,3362.64 6463.13,3397.91 6466.63,3397.85 6470.79,3397.45 6480.07,3396.43 6484.67,3396.19 6486.85,3396.23 6488.9,3396.41 6490.8,3396.74 6492.5,3397.26 6493.98,3398
  region net SCK: 6461.99,3510.23 6467.99,3510.23 6468.18,3508.68 6468.71,3507.12 6469.55,3505.54 6470.65,3503.97 6471.98,3502.39 6473.49,3500.82 6476.91,3497.74 6484.19,3491.9 6487.42,3489.24 6489.94,3486.81 6440.05,3486.81 6442.57,3489.24 6445.79,3491.9 6453.08,3497.74 6456.5,3500.82 6458.01,3502.39 6459.34,3503.97 6460.44,3505.54 6461.28,3507.12 6461.81,3508.68
  region net SCK: 6467.99,4442.21 6461.99,4445.19 6461.88,4446.77 6461.55,4447.97 6461.04,4448.9 6460.38,4449.67 6458.73,4451.24 6457.8,4452.26 6456.84,4453.6 6474.49,4450.62 6472.1,4448.79 6470.02,4447 6469.19,4446.01 6468.55,4444.91 6468.14,4443.66
  region net VBUS: 7126.51,3437.28 7126.51,3417.28 7123.86,3417.19 7121.36,3416.97 7116.98,3416.28 7113.76,3415.59 7112.1,3415.27 7112.1,3439.29 7113.76,3438.97 7116.98,3438.28 7121.36,3437.59 7123.86,3437.37
  region net VBUS: 7286.51,3417.28 7286.51,3437.28 7288.92,3437.37 7290.81,3437.6 7293.71,3438.33 7296.62,3439.07 7298.51,3439.33 7300.92,3439.45 7301.24,3415.43 7298.78,3415.48 7296.85,3415.68 7293.87,3416.32 7290.9,3416.98 7288.97,3417.2
  region net VBUS: 7304.2,3444.7 7318.34,3430.56 7316.53,3428.63 7314.92,3426.69 7312.31,3423.11 7310.52,3420.34 7309.57,3418.95 7292.59,3435.93 7293.98,3436.88 7296.75,3438.67 7300.33,3441.28 7302.26,3442.89
  region net VBUS: 7938.06,3774.34 7923.91,3760.2 7921.4,3762.32 7918.77,3763.84 7916.01,3764.88 7913.13,3765.52 7910.13,3765.88 7906.99,3766.06 7900.33,3766.31 7931.95,3797.93 7932.2,3791.26 7932.38,3788.13 7932.74,3785.12 7933.38,3782.24 7934.41,3779.49 7935.93,3776.86
  region net 5V: 6816.68,3645.54 6802.24,3659.38 6803.6,3660.87 6804.74,3662.36 6805.67,3663.87 6806.42,3665.4 6807.01,3666.94 6807.45,3668.52 6807.97,3671.76 6808.14,3675.15 6808.13,3678.73 6808.09,3682.53 6808.17,3686.58 6843.74,3651.6 6839.68,3651.46 6835.9,3651.47 6832.34,3651.46 6828.98,3651.28 6825.77,3650.76 6824.22,3650.32 6822.68,3649.74 6821.16,3648.99 6819.66,3648.05 6818.17,3646.91
  region net 5V: 6496.99,4034.57 6516.99,4034.57 ccw(c6554.49,4034.57) 6531.99,4004.57 6481.99,4004.57 ccw(c6459.49,4034.57)
  region net 5V: 6516.99,4145.59 6496.99,4145.59 6496.91,4148.24 6496.68,4150.74 6495.99,4155.12 6495.3,4158.34 6494.99,4160 6519,4160 6518.69,4158.34 6518,4155.12 6517.31,4150.74 6517.08,4148.24
  region net 5V: 7380.34,4800.79 7362.77,4790.08 7361.25,4791.49 7359.76,4792.66 7358.28,4793.61 7356.82,4794.37 7353.88,4795.39 7350.86,4795.92 7347.69,4796.15 7344.29,4796.26 7340.58,4796.46 7336.49,4796.93 7375.03,4828.61 7374.6,4820.78 7374.5,4817.07 7374.65,4813.52 7375.19,4810.1 7375.63,4808.45 7376.23,4806.84 7376.98,4805.27 7377.9,4803.74 7379.02,4802.25
  region net 5V: 6881.01,3659.73 6866.86,3645.59 6865.38,3646.96 6863.88,3648.1 6862.38,3649.03 6860.85,3649.78 6859.31,3650.37 6857.75,3650.81 6854.52,3651.33 6851.14,3651.51 6847.58,3651.5 6843.79,3651.48 6839.73,3651.59 6875.01,3686.86 6875.12,3682.81 6875.09,3679.02 6875.09,3675.45 6875.27,3672.07 6875.79,3668.85 6876.23,3667.28 6876.81,3665.74 6877.56,3664.22 6878.5,3662.71 6879.64,3661.22
  region net 5V: 7488.69,3349.1 7474.54,3363.24 7476.35,3365.18 7477.96,3367.11 7480.57,3370.69 7482.36,3373.46 7483.31,3374.85 7500.29,3357.87 7498.9,3356.92 7496.14,3355.13 7492.55,3352.52 7490.62,3350.91
  region net RST: 7059.99,4733.59 7053.99,4733.59 7053.86,4735.1 7053.48,4736.32 7052.9,4737.33 7052.14,4738.22 7050.23,4739.91 7048.04,4741.99 7065.94,4741.99 7063.76,4739.91 7061.85,4738.22 7061.09,4737.33 7060.51,4736.32 7060.13,4735.1
  region net RST: 7053.99,4574.41 7059.99,4568.41 7060.11,4567.25 7060.41,4566.02 7061.4,4563.43 7062.56,4560.86 7063.47,4558.55 7047.19,4566.01 7048.46,4566.64 7049.69,4567.42 7050.84,4568.34 7051.87,4569.37 7052.74,4570.51 7053.41,4571.74 7053.84,4573.04
  region net $1N3534: 6830.1,3389.95 6834.34,3385.71 6833.06,3384.3 6832.09,3382.98 6831.39,3381.74 6830.95,3380.54 6830.72,3379.37 6830.67,3378.22 6830.99,3375.89 6832.36,3370.65 6832.9,3367.45 6833.01,3365.65 6832.98,3363.69 6808.08,3388.59 6810.05,3388.62 6811.85,3388.5 6815.05,3387.97 6820.29,3386.59 6822.61,3386.27 6823.76,3386.32 6824.93,3386.55 6826.13,3387 6827.38,3387.69 6828.7,3388.66
  region net $1N3534: 6869.99,3488.59 6863.99,3488.59 6863.86,3490.1 6863.48,3491.32 6862.9,3492.33 6862.14,3493.22 6860.23,3494.91 6858.04,3496.99 6875.94,3496.99 6873.76,3494.91 6871.85,3493.22 6871.09,3492.33 6870.51,3491.32 6870.13,3490.1
  region net $1N3535: 7109.99,3865.65 7103.99,3865.65 ccw(c7092.74,3865.65) 7099.49,3874.65 7114.49,3874.65 ccw(c7121.24,3865.65)
  region net $1N3535: 7001.48,3463.73 7005.72,3459.48 7004.75,3458.32 7004.15,3457.19 7003.85,3456.06 7003.76,3454.89 7003.92,3452.35 7003.98,3449.33 6991.33,3461.99 6994.35,3461.92 6996.89,3461.77 6998.05,3461.85 6999.19,3462.16 7000.32,3462.76
  region net 5V: 7923.91,3911.06 7938.06,3896.92 7935.93,3894.4 7934.41,3891.77 7933.38,3889.02 7932.74,3886.14 7932.38,3883.13 7932.2,3880 7931.95,3873.33 7900.33,3904.95 7906.99,3905.2 7910.13,3905.38 7913.13,3905.74 7916.01,3906.38 7918.77,3907.41 7921.4,3908.94

## Silkscreen, mask and mechanical layers (free items; w line width, h text height)
Top Silkscreen Layer:
  text "SCK /  / WS /  / GND" at 6526.99,3240 h45
  text "SD /  / VCC /  / GND" at 6231.99,3235 h45

## Text inside footprints (layer, text, board x,y; h text height)
MIC1: Top Silkscreen Layer "+" at 6716.99,3400 h39.37